# Altium PCB COMBINED.PcbDoc (part 2 of 3)
Units mil, origin at the board's own origin, x right, y up, seen from the top; angles counter-clockwise.
Board outline 6800 x 2100 mil, 4 copper layers (Top Layer, Mid-Layer 1, Mid-Layer 2, Bottom Layer); 221 components, 0 nets, 1007 pads, 208 vias.
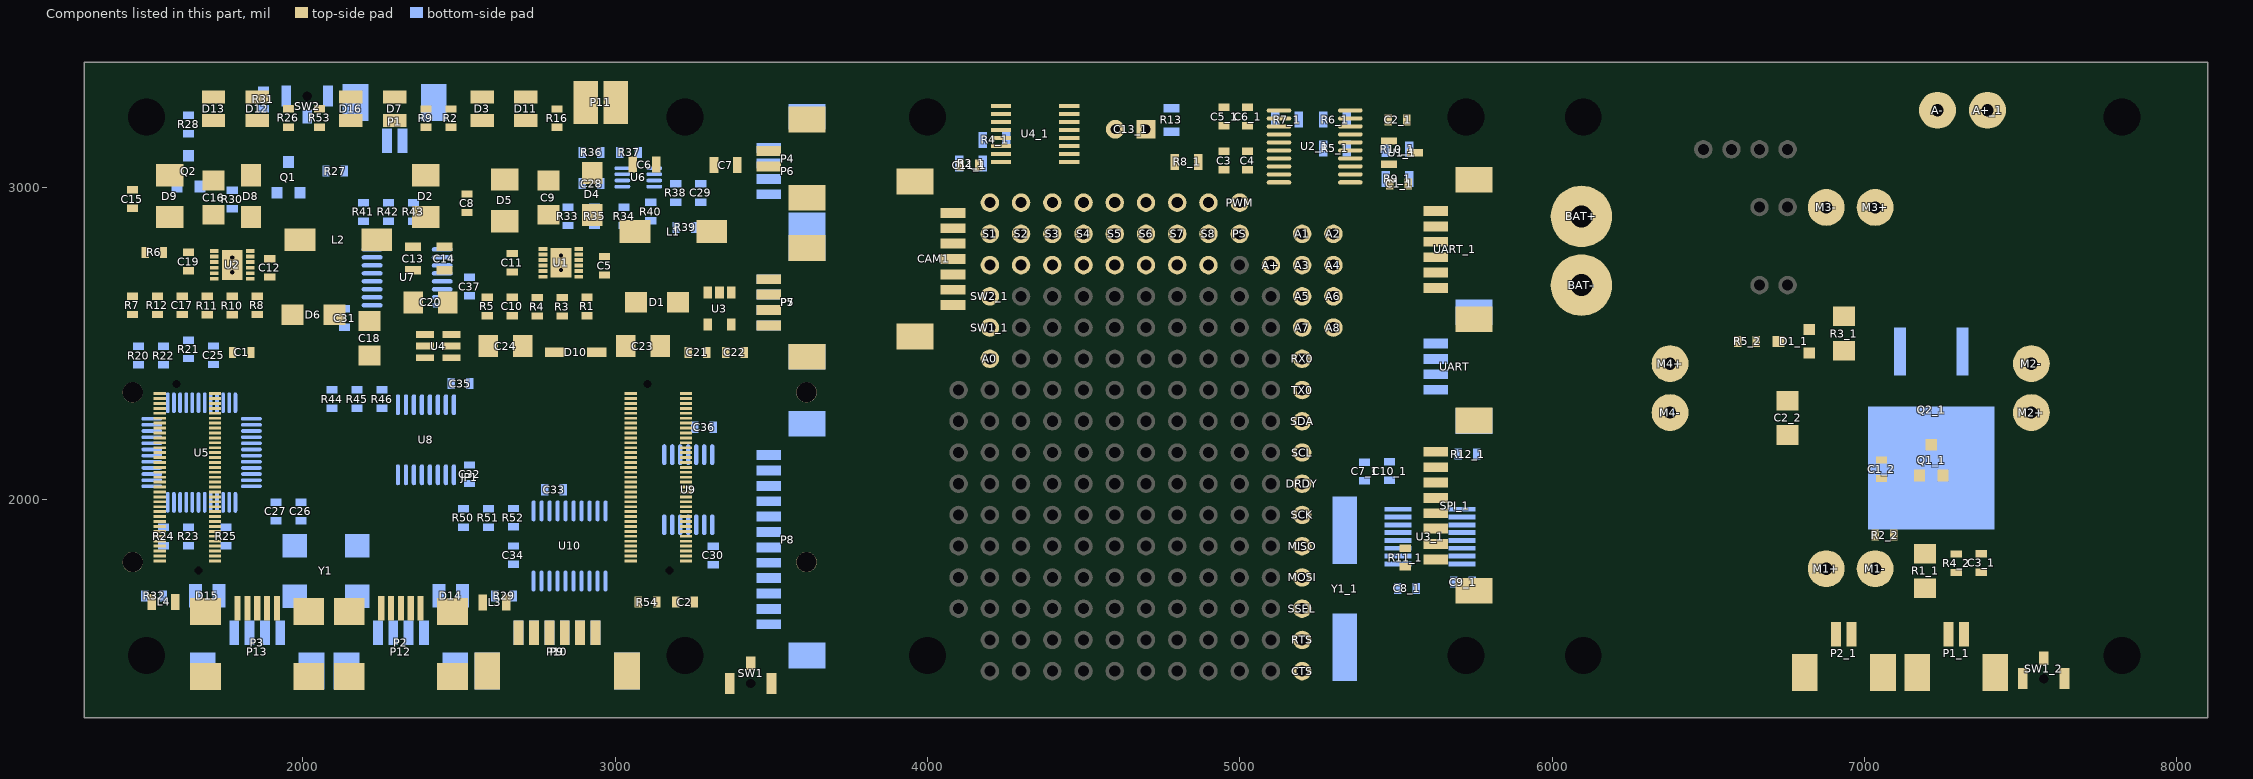
[diagram p4: the components of this part, seen from the top]

## Via types
v1: diameter 30, hole 15, Top Layer to Bottom Layer, 126 vias
v2: diameter 50, hole 28, Top Layer to Bottom Layer, 82 vias

## Nets (pads, with @x,y where several pads share a name; then routed paths per layer and width w, separated by ;. In a path a pad name is that pad's centre, name@x,y a point inside that pad or via, vN(x,y) a via of type N, cw(c..) or ccw(c..) an arc to the next point about the centre after c; other vN are vias at no path point) (continued)
copper on no net: | length 181000.9
  Top Layer w9: v1(1424.33,1845.83) 1474.33,1845.83 1484.74,1835.42 1541.39,1835.42 1542.2,1834.61 ; v1(1438.07,2035.28) 1428.93,2044.42 1428.93,2146.21 1448.03,2165.32 1542.2,2165.32 ; v1@1441.16,2202.66 1409.33,2170.83 1409.33,1925.83 1454.33,1880.83 1494.33,1880.83 1509.06,1866.1 1542.2,1866.1 ; v1@1441.16,2242.66 1389.33,2190.83 1389.33,1920.83 1449.33,1860.83 1484.33,1860.83 1494.8,1850.35 1542.2,1850.35 ; v1(1454.33,2070.83) 1454.33,2140.12 1463.78,2149.57 1542.2,2149.57 ; v1(1464.33,1955.83) 1474.33,1955.83 1499.02,1931.14 1511.03,1931.14 1513.07,1929.09 1542.2,1929.09 1541.39,1929.91 1534.07,1929.91 ; v1@1466.81,1913.35 1469.7,1916.23 1504.85,1916.23 1507.74,1913.35 1542.2,1913.35 1541.39,1914.16 ; v1(1489.33,1985.83) 1499.33,1975.83 1499.33,1955.83 1509.11,1946.04 1517.2,1946.04 1518.4,1944.84 1542.2,1944.84 ; 1542.2,1818.86 1571.3,1818.86 1579.33,1810.83 1579.33,1785.83 1569.33,1775.83 v1(1544.33,1775.83) ; 1542.2,1897.6 1565.39,1897.6 1577.16,1885.83 v1(1594.33,1885.83) ; 1542.2,2007.83 1651.77,2007.83 1669.37,2025.43 1669.37,2099.25 1626.09,2142.53 1626.09,2249.87 v1(1628.03,2251.81) ; 1542.2,2039.33 1582.64,2039.33 1597.52,2024.45 1640.83,2024.45 1649.69,2033.31 1649.69,2097.86 1583.74,2163.8 1583.74,2228.19 1586.69,2231.14 v1(1587.68,2231.14) ; 1542.2,2070.83 1578.7,2070.83 1595.55,2053.98 v1(1616.22,2053.98) ; 1542.2,2118.07 1597.4,2118.07 1613.27,2102.2 v1(1613.27,2096.3) ; v1(1667.4,2201.61) 1682.17,2201.61 1686.97,2196.81 1719.37,2196.81 1718.56,2197.63 ; v1(1669.37,2160.28) 1690.16,2181.06 1719.37,2181.06 ; 1719.37,1803.11 1787.12,1803.11 1822.84,1767.39 v1(1822.84,1720.83) 1822.84,1650.83 ; 1719.37,1818.86 1806.3,1818.86 1854.33,1770.83 1854.33,1650.83 ; 1719.37,1834.61 1835.55,1834.61 1904.06,1766.1 v2(1904.06,1721.1) ; 1719.37,1850.35 1693.11,1850.35 1684.25,1841.5 1684.25,1795.91 1724.33,1755.83 v2(1729.33,1755.83) v2@1734.33,1755.83 ; 1719.37,1929.09 1826.06,1929.09 v1(1864.33,1890.83) ; 1719.37,1960.59 1839.09,1960.59 v1(1839.33,1960.83) ; 1719.37,2023.58 1751.93,2023.58 1788.56,1986.95 1920.26,1986.95 1967.88,2034.58 1967.88,2327.32 1874.78,2420.42 1807.95,2420.42 1806.28,2422.09 1739.25,2422.09 1721.54,2404.37 1721.54,2373.86 1722.57,2372.83 v1(1723.33,2372.83) ; 1719.37,2055.08 1747.99,2055.08 1801.22,2001.85 1914.08,2001.85 1952.98,2040.75 1952.98,2312.69 1870.16,2395.51 v1(1756.97,2395.51) ; 1719.37,2086.57 1758.58,2086.57 1828.4,2016.76 1906.76,2016.76 1938.07,2048.07 1938.07,2298.07 1866.22,2369.92 v1(1790.43,2369.92) ; 1719.37,2118.07 1748.17,2118.07 1774.86,2091.38 1792.52,2091.38 1818.98,2117.83 v1@1818.98,2290.59 ; 1719.37,2228.31 1758.82,2228.31 1765.83,2221.3 v1(1765.83,2177.01) ; 1719.37,2259.8 1720.19,2258.99 1749.22,2258.99 1791.23,2216.97 1791.23,2136.47 v1(1778.62,2123.86) ; 1719.37,2275.55 1762.76,2275.55 1806.93,2319.72 1838.66,2319.72 1892.8,2265.59 v1(1892.8,2081.54) ; 1719.37,2291.3 1742.75,2291.3 1789.88,2338.43 1851.46,2338.43 1921.34,2268.54 1921.34,2069.72 v1(1893.78,2042.17) ; 1719.37,2307.05 1693.11,2307.05 1682.02,2318.14 1682.02,2413.52 1739.33,2470.83 1739.33,2490.78 v2(1775.09,2526.54) ; v1@1819.96,2288.23 1820.43,2288.7 v1(1820.43,2290.59) ; 2009.84,1650.83 2019.69,1640.98 ; 2282.84,1650.83 2284.74,1652.73 v1@2284.74,1765.83 ; v1(2289.33,1765.83) 2273.93,1781.23 2273.93,2040.42 2619.74,2386.23 2960.07,2386.23 2977.92,2368.38 3067.21,2368.38 3094.65,2395.83 3119.33,2395.83 3159.24,2355.92 3248.79,2355.92 3258.36,2346.36 3258.36,2330.73 3250.42,2322.8 3227.24,2322.8 ; 2314.33,1650.83 v1(2314.33,1717.87) 2314.74,1718.28 2314.74,1776.35 2314.33,1776.76 2314.33,1820.83 2339.33,1845.83 2479.33,1845.83 2554.33,1770.83 3094.33,1770.83 3167.34,1843.84 3167.34,2318.84 3186.52,2338.02 3226.72,2338.02 3227.24,2338.54 ; 2345.83,1650.83 2345.83,1739.33 2334.33,1750.83 2334.33,1805.83 2349.33,1820.83 2468.46,1820.83 2541.42,1747.87 3074.33,1747.87 ; 2374.33,1653.82 2377.32,1650.83 2379.33,1652.83 ; v2@2374.33,1755.83 v2(2374.33,1775.83) ; v2(2469.33,2965.83) 2481.02,2977.52 2526.54,2977.52 2577.64,2977.52 2584.33,2970.83 ; 2688.93,1575.25 2691.3,1572.87 ; 2688.93,1695.42 2691.3,1697.8 ; v1(2719.33,1650.83) 2729.33,1650.83 2740.51,1639.65 2740.51,1572.87 ; v1(2744.33,1895.83) 2744.33,1880.83 2790.55,1834.61 3050.08,1834.61 ; v1(2754.72,1676.22) 2754.33,1675.83 2754.33,1660.83 2789.72,1625.43 2789.72,1572.87 ; v1(2794.33,1675.83) 2794.33,1665.83 2838.94,1621.22 2838.94,1572.87 ; v1(2833.71,1675.83) 2834.33,1675.83 2888.15,1622.01 2888.15,1572.87 ; v1(2839.33,1900.83) 2839.33,1894.9 2883.87,1850.35 3050.08,1850.35 3049.26,1851.17 ; v1(2879.33,1890.83) 2969.33,1890.83 2979.96,1901.45 3013.71,1901.45 3017.56,1897.6 3050.08,1897.6 ; v1(2899.33,2360.83) 2899.33,2095.83 3003.07,1992.09 3050.08,1992.09 ; v1(2929.33,2290.83) 2929.33,2245.83 2978.35,2196.81 3050.08,2196.81 ; v1(2951.68,2353.48) 2957.18,2347.98 3020.58,2347.98 3026.08,2353.48 3076.68,2353.48 3152.44,2277.72 3152.44,1988.93 3108.35,1944.84 3050.08,1944.84 ; v1(2994.33,1875.83) 3000.35,1881.85 3050.08,1881.85 ; v1(2994.33,2290.83) 2999.33,2290.83 3013.79,2276.37 3049.26,2276.37 3050.08,2275.55 ; v1(2999.33,1805.83) 3012.36,1818.86 3050.08,1818.86 ; 3002.56,3237.6 3002.56,3270.83 3032.56,3300.83 ; 3050.08,1803.11 3086.61,1803.11 v1(3099.33,1815.83) ; 3050.08,1866.1 v1@3094.33,1866.1 ; 3050.08,2133.82 3087.32,2133.82 3094.33,2140.83 v1(3094.33,2210.83) ; 3050.08,2244.06 3101.1,2244.06 3122.63,2222.53 3122.63,2039.12 v1(3094.33,2010.83) ; 3050.08,2307.05 3088.11,2307.05 3137.53,2257.63 3137.53,2014.03 v1(3094.33,1970.83) ; 3074.33,1670.83 3074.33,1747.87 ; v1@3099.33,2005.83 v1@3104.33,2005.83 ; v2(3214.33,1730.83) 3224.33,1740.83 3224.33,1803.11 ; 3227.24,1850.35 3227.24,1866.1 ; 3227.24,1944.84 3283.35,1944.84 3305.24,1966.73 v1(3305.24,1972.99) ; 3227.24,1960.59 3228.06,1961.41 3259.91,1961.41 3269.33,1970.83 v1(3269.33,1980.83) ; 3227.24,2007.83 3291.34,2007.83 v1(3294.33,2010.83) ; 3227.24,2055.08 3258.58,2055.08 ; 3227.24,2118.07 3204.04,2118.07 3197.15,2111.18 3197.15,2030.49 3204.06,2023.58 3227.24,2023.58 3267.09,2023.58 3394.33,2150.83 3394.33,2200.83 ; 3227.24,2181.06 3204.06,2181.06 3182.25,2159.25 3182.25,1823.74 3106.38,1747.87 3074.33,1747.87 ; 3234.33,2470.83 3234.33,2440.83 3244.33,2430.83 3314.33,2430.83 3354.33,2470.83 ; v1(3424.33,2655.83) 3491.89,2655.83 3492.28,2655.43 ; 3439.33,2195.83 v2(3484.33,2195.83) ; 3492.28,2606.22 3608.94,2606.22 v1(3609.33,2605.83)
  Top Layer w10: 1454.33,2590.83 1425.24,2619.92 1425.24,2669.09 1545.24,2789.09 ; 1495.28,2790.83 1495.28,2774.57 1409.33,2688.62 1409.33,2416.38 1418.39,2407.32 1617.2,2407.32 1653.94,2370.59 1653.94,2241.08 ; 1554.33,2790.83 1589.13,2825.63 1667.4,2825.63 1673.31,2819.72 1673.31,2801.02 1696.93,2777.4 1717.24,2777.4 ; 1614.33,2650.83 1687.76,2724.25 1717.24,2724.25 ; 1634.33,2790.83 1665.47,2759.69 1717.24,2759.69 ; 1653.93,2241.07 1653.93,2231.69 1653.94,2226.54 1641.5,2214.09 1641.5,2149.76 1685.12,2106.14 1685.12,1923.71 1695.48,1913.35 1719.37,1913.35 ; 1694.33,2649.88 1695.95,2651.5 1695.95,2685.24 1717.24,2706.54 ; 1719.37,2322.8 1719.37,2338.54 1719.37,2340.15 1697.43,2362.1 1697.43,2402.05 1735.15,2439.77 1763.28,2439.77 1775.28,2451.77 1775.28,2470.83 1789.33,2470.83 1804.33,2455.83 1804.33,2445.83 1814.33,2435.83 1874.38,2435.83 1914.38,2475.83 v2@1979.87,2475.83 ; 1734.33,2590.83 1734.33,2677.01 1774.33,2717.01 1774.33,2727.2 1774.33,2750.83 ; 1831.42,2724.25 1848.81,2724.25 1856.1,2716.96 1856.1,2652.6 1854.33,2650.83 ; 1831.42,2741.97 1831.42,2759.69 ; 1831.42,2777.4 1849.49,2777.4 1865.24,2761.65 1865.24,2740.87 1894.33,2711.77 1967.4,2638.7 1967.4,2590.83 ; 1834.33,2903.9 1831.42,2900.98 1831.42,2795.12 1870.04,2795.12 1894.33,2770.83 ; 2391.85,2528.39 2392.01,2528.23 ; 2414.33,2490.83 2451.73,2453.43 ; 2590.87,2588.11 2670.87,2588.11 ; 2666.54,2637.52 2666.54,2652.52 2744.96,2730.95 2769.45,2730.95 ; 2670.87,2787.17 2707.83,2787.17 2728.62,2766.38 2769.45,2766.38 ; 2746.54,2636.57 2749.88,2639.92 2749.88,2693.66 2769.45,2713.23 ; 2790.43,2587.17 2790.43,2677.01 2826.54,2713.11 2826.54,2733.9 2826.54,2757.52 ; 2826.54,2642.24 2831.46,2647.17 ; 2883.62,2730.95 2901.01,2730.95 2908.31,2723.65 2908.31,2647.17 2910.87,2647.17 ; 2883.62,2748.66 2883.62,2766.38 ; 2883.62,2784.09 2907.76,2784.09 2926.26,2765.59 2926.26,2724.25 2932.05,2718.46 2966.54,2718.46 ; 2883.62,2801.81 2915.53,2801.81 2939.82,2777.52 2966.54,2777.52 ; 3063.5,2833.94 3063.5,2857.52 ; 3293.39,2470.83 3296.93,2474.37 ; 3296.93,2662.01 3296.93,2638.23 3304.33,2630.83 3359.33,2630.83 3371.73,2643.23 3371.73,2662.01 ; v1(4005,2635) 4000.59,2630.59 4000.59,2629.17 4007.8,2621.97 4082.05,2621.97 ; v1(4010,2870) 4011.97,2868.03 4082.05,2868.03 ; v1(4014.83,2765.17) 4019.26,2769.61 4082.05,2769.61 ; v1(4015,2815) 4018.82,2818.82 4082.05,2818.82 ; v1(4055,3045) 4080,3070 4105,3070 ; 4082.05,2671.18 4033.36,2671.18 3962,2742.54 3962,2896.16 4095.84,3030 4274.6,3030 4330,3085.4 4330,3105 4303.39,3131.61 4235.75,3131.61 ; 4082.05,2917.24 4120,2955.2 v1(4120,2965) ; v1(4140,3200) 4140,3145.59 4179.57,3106.02 4235.75,3106.02 ; v1(4150,3000) 4091.3,3000 3980,2888.7 3980,2750 4009.61,2720.39 4082.05,2720.39 4130.39,2720.39 4148,2738 4148,2873 4175,2900 4950,2900 5000,2950 ; 4174.49,3080.43 4164.06,3070 4180,3070 4190.43,3080.43 4235.75,3080.43 4285.43,3080.43 v1(4295,3090) ; v1(4175,3230) 4175,3170 4187.8,3157.2 4235.75,3157.2 ; 4200,2950 4230,2950 4411.61,3131.61 4454.25,3131.61 ; 4235.75,3233.98 4296.02,3233.98 v1(4310,3220) ; 4300,2950 4300,2990 4416.02,3106.02 4454.25,3106.02 ; v1(4342.8,3157.2) 4454.25,3157.2 ; v1(4363.98,3233.98) 4454.25,3233.98 ; 4454.25,3080.43 4569.57,3080.43 4700,2950 ; 4454.25,3182.8 4507.2,3182.8 4690,3000 4750,3000 4800,2950 ; 4454.25,3208.39 4511.61,3208.39 4700,3020 4830,3020 4900,2950 ; 4454.25,3259.57 4509.57,3259.57 v1(4525,3275) ; v1(4740,3090) 4749.25,3080.75 4792.6,3080.75 ; 5125.83,3014.84 5050,2939.02 5050,2625 5075,2600 5150,2600 5200,2550 ; 5125.83,3040.43 5167.76,3040.43 5178.2,3030 5178.2,3006.6 5139.47,2967.88 5139.47,2785.07 5157.47,2767.07 5157.47,2692.53 5200,2650 ; 5125.83,3066.02 5178.98,3066.02 5196.2,3048.8 5196.2,2999.15 5157.47,2960.42 5157.47,2792.53 5200,2750 ; 5125.83,3091.61 5183.39,3091.61 5214.2,3060.8 5214.2,2991.69 5175.47,2952.97 5175.47,2874.53 5200,2850 ; 5125.83,3117.2 5028.15,3117.2 5025,3114.06 4950,3114.06 4950,3195.94 5025,3195.94 ; 5125.83,3142.8 5042.2,3142.8 5025,3160 5025,3195.94 ; 5200,1450 5520,1450 v1(5575,1505) ; 5200,1550 5550,1550 v1(5610,1610) ; 5200,1650 5273.94,1650 5482.8,1858.86 ; 5200,1750 5324.72,1750 5579.33,2004.61 5627.95,2004.61 ; 5200,1850 5375.51,1850 5579.33,2053.82 5627.95,2053.82 ; 5200,1950 5426.3,1950 5579.33,2103.03 5627.95,2103.03 ; 5200,2050 5455,2050 5558.07,2153.07 5647.28,2153.07 ; 5200,2150 5200,2189.86 5260.53,2250.38 5260.53,2374.02 5450.53,2564.02 5450.53,2725.53 5500.39,2775.39 5627.95,2775.39 5628.35,2775 v1(5725,2775) ; 5200,2250 5242.53,2292.53 5242.53,2381.47 5332.53,2471.47 5432.53,2571.47 5432.53,2732.98 5524.15,2824.61 5627.95,2824.61 5694.61,2824.61 v1(5695,2825) ; 5200,2350 5224.53,2374.53 5224.53,2388.93 5325.07,2489.47 5414.53,2578.93 5414.53,2740.44 5547.91,2873.82 5627.95,2873.82 ; 5200,2450 5260.14,2450 5317.62,2507.47 5396.53,2586.38 5396.53,2747.89 5571.66,2923.03 5627.95,2923.03 ; v1(5230,3215) 5225.43,3219.57 5125.83,3219.57 5079.57,3219.57 5055,3195 5025.94,3195 5025,3195.94 ; 5300,2550 5378.53,2628.53 5378.53,2955.34 5354.17,2979.69 5354.17,3014.84 ; 5300,2650 5300,2689.86 5360.53,2750.38 5360.53,2947.88 5301.8,3006.6 5301.8,3035 5307.24,3040.43 5354.17,3040.43 ; 5300,2750 5300,2789.86 5342.53,2832.38 5342.53,2940.42 5321.48,2961.48 5283.8,2999.15 5283.8,3053.8 5296.02,3066.02 5354.17,3066.02 ; 5300,2850 5324.53,2874.53 5324.53,2932.97 5265.8,2991.69 5265.8,3067.78 5289.64,3091.61 5354.17,3091.61 ; 5354.17,3117.2 5417.2,3117.2 v1(5420,3120) ; 5354.17,3193.98 5401.02,3193.98 v1(5425,3170) ; 5354.17,3219.57 5424.57,3219.57 v1(5425,3220) ; v1(5420,3075) 5422.4,3072.6 5478.66,3072.6 5478.66,3012.28 5480.94,3010 ; v1(5440,1735) 5515,1735 5530,1750 5530,1784.27 5570,1824.27 5570,1875 5601.18,1906.18 5627.95,1906.18 ; v1(5475,3260) 5475.94,3259.06 5475.94,3215 5478.66,3212.28 5478.66,3147.4 ; 5530,1843.33 5498.33,1843.33 5482.8,1858.86 ; v1(5550,2735) 5558.82,2726.18 5627.95,2726.18 ; v1(5560,2675) 5561.97,2676.97 5627.95,2676.97 ; 5627.95,1807.76 5627.95,1712.05 v1(5655,1685) ; 5627.95,1856.97 5768.03,1856.97 v1(5790,1835) ; 5627.95,1955.39 5579.33,1955.39 5482.8,1858.86 ; 5647.28,1956.22 5708.94,1956.22 v1(5789.33,1875.83) ; 5647.28,2005.43 5728.94,2005.43 v1(5734.33,2010.83) ; 5647.28,2054.65 5705.51,2054.65 v1(5714.33,2045.83) ; 5647.28,2103.86 5741.3,2103.86 5789.33,2055.83 v1(5789.33,1920.83)
  Top Layer w15: 1711.73,3290.83 1714.33,3288.23 ; v2(1775.09,2526.54) 1813.62,2526.54 1834.33,2505.83 1834.33,2470.83 ; 1885.83,1650.83 1885.83,1702.87 v2(1904.06,1721.1) v2@1904.33,1721.38 ; 2214.33,2550.83 2214.33,2639.29 2273.7,2698.66 2384.92,2698.66 2412.48,2671.1 2412.48,2592.4 2476.65,2528.23 ; 2251.34,1650.83 2251.34,2052.83 2605.93,2407.42 2743.68,2407.42 2743.75,2407.49 2967.67,2407.49 2988.87,2386.29 3059.79,2386.29 3094.33,2420.83 3124.33,2420.83 3164.33,2380.83 3254.33,2380.83 3284.33,2350.83 3284.33,2080.83 3258.58,2055.08 ; 2392.01,2490.83 2414.33,2490.83 ; 2451.73,2453.43 2476.65,2453.43 2508.54,2421.54 v2(2540.09,2421.54) ; 2464.57,2630.83 2464.57,2661.06 ; 2590.87,2647.17 2590.87,2697.32 v2(2605.09,2711.54) ; v2@2621.66,2728.11 2670.87,2728.11 ; 2688.93,1575.25 2688.93,1695.42 ; 2691.3,1697.8 v1@2711.83,1718.33 ; 2704.57,2490.83 2744.38,2490.83 v2(2785.09,2531.54) 2785.09,2581.82 2790.43,2587.17 ; 2714.33,3288.23 2775.98,3288.23 2814.33,3249.88 ; 2937.36,1572.87 2937.36,1623.86 v2(2964.33,1650.83) 2999.33,1615.83 3124.33,1615.83 3133.39,1624.88 3133.39,1670.83 3194.33,1670.83 3194.33,1700.83 3214.33,1720.83 v2(3214.33,1730.83) ; 3029.33,2485.83 3034.33,2490.83 ; 3144.57,2490.83 3164.33,2490.83 ; 3201.26,2630.83 3249.33,2630.83 3280.51,2662.01 3296.93,2662.01 ; 3214.33,1860.83 3244.33,1860.83 3260.34,1844.82 3260.34,1799.82 3279.33,1780.83 3279.33,1696.77 3253.39,1670.83 ; 3296.93,2474.37 3296.93,2559.65 ; v1(3334.33,2524.83) 3354.33,2504.83 3354.33,2470.83 ; 3334.33,2662.01 3334.33,2695.83 3374.33,2735.83 v2(3404.33,2735.83) 3461.1,2735.83 3492.28,2704.65 ; 3367.4,1410.83 v1@3367.4,1513.9 ; 3371.73,2559.65 3371.73,2533.43 3414.33,2490.83 3414.33,2471.77 ; 3371.73,2605.83 v2(3404.33,2605.83) ; v1(3424.33,3135.83) 3424.33,3060.1 3541.87,2942.56 3541.87,2758.15 3569.33,2730.69 v1(3569.33,2705.83) 3644.33,2630.83 3644.33,2585.83 3615.51,2557.01 3492.28,2557.01 ; 3492.28,3066.22 3492.68,3065.83 v1(3569.33,3065.83) ; 3492.28,3115.43 3492.68,3115.83 v1(3599.33,3115.83) ; 6909.72,1567.87 6909.72,1621.22 6924.33,1635.83 7159.33,1635.83 7227.28,1567.87 7269.72,1567.87 v1(7269.72,1491.22) ; 6958.94,1567.87 7182.28,1567.87 7234.33,1515.83 7234.33,1470.83 7254.33,1450.83 7299.33,1450.83 7318.94,1470.43 7318.94,1567.87 7452.28,1567.87 7507.4,1512.76 7507.4,1425.83 ; v1(7639.33,1490.83) 7641.26,1488.9 7641.26,1425.83
  Top Layer w20: v2(1444.33,1650.83) 1465.32,1671.81 1516.93,1671.81 ; 1534.33,2591.77 1614.33,2591.77 ; 1546.46,2931.77 1574.33,2903.9 ; 1591.73,1671.81 1658.15,1671.81 1688.98,1640.98 1688.98,1432.32 2019.69,1432.32 2019.69,1640.98 ; v2(1629.33,3290.83) 1711.73,3290.83 ; 1694.33,2590.83 1734.33,2590.83 1774.33,2590.83 ; 1707.4,2903.9 1714.33,2910.83 1717.24,2907.91 1717.24,2802.99 ; v2(1714.33,3155.83) 1714.33,3213.43 ; 1775.28,2650.83 1854.33,2650.83 ; v2(1784.33,1755.83) 1784.33,1657.83 1791.34,1650.83 ; v2(1854.33,3155.83) 1854.33,3213.43 ; 1854.33,3288.23 1915.98,3288.23 1954.33,3249.88 ; 1894.33,2770.83 1931.3,2770.83 1991.3,2830.83 ; 1917.32,1650.83 2009.84,1650.83 ; v2(1954.33,3145.83) 1954.33,3190.83 ; v2(2054.33,3150.83) 2054.33,3145.83 2054.33,3190.83 ; 2054.33,3249.88 2092.68,3288.23 2154.33,3288.23 ; 2148.98,1640.98 2148.98,1432.32 2479.69,1432.32 2479.69,1640.98 2508.54,1669.84 2576.93,1669.84 ; v2(2149.33,3120.83) 2154.33,3125.83 2154.33,3213.43 ; 2214.33,2440.59 2257.44,2397.48 2360.32,2397.48 2392.01,2429.17 2392.01,2453.43 ; v2(2219.33,3140.83) 2272.43,3140.83 2294.33,3162.73 2294.33,3213.43 ; 2237.36,2830.83 2259.96,2808.23 2353.35,2808.23 2453.35,2808.23 ; 2294.33,3288.23 2355.98,3288.23 2394.33,3249.88 ; v2(2312.09,2456.54) 2346.38,2490.83 2392.01,2490.83 ; v2(2312.09,2528.39) 2391.85,2528.39 ; 2353.35,2733.43 2453.35,2733.43 ; 2374.33,1653.82 v2(2374.33,1775.83) ; 2394.33,3190.83 v2(2394.33,3145.83) v2(2474.33,3145.83) 2474.33,3190.83 ; 2474.33,3249.88 2512.68,3288.23 2574.33,3288.23 ; 2476.65,2490.83 2594.33,2490.83 2594.33,2446.93 2610.43,2430.83 2733.99,2430.83 2773.99,2470.83 v2@2807.4,2470.83 ; v2(2539.33,3155.83) 2574.33,3190.83 2574.33,3213.43 ; v2(2574.33,1605.83) 2624.33,1605.83 2651.73,1633.23 2651.73,1669.84 ; 2618.66,2918.46 2646.54,2890.59 2717.6,2890.59 2744.53,2917.52 2786.54,2917.52 2786.54,2858.15 2769.76,2841.38 2769.76,2805.95 ; v2(2644.33,3175.83) 2681.93,3213.43 2714.33,3213.43 ; 2750.87,2587.17 2790.43,2587.17 2830.87,2587.17 ; v2(2779.33,3170.83) v2@2794.33,3170.83 ; 2814.33,3190.83 v2@2794.33,3170.83 ; 2831.46,2647.17 2908.31,2647.17 ; 2906.1,3270.83 2906.1,3182.6 2894.33,3170.83 v2@2794.33,3170.83 ; 2910.87,2588.11 2944.29,2588.11 2982.36,2550.04 ; 2941.26,2470.83 2941.26,2508.94 2982.36,2550.04 ; 2966.54,2718.46 2966.54,2684.96 3024.33,2627.17 3063.94,2627.17 ; 2966.54,2777.52 3007.09,2777.52 3063.5,2833.94 ; 3144.57,2490.83 3144.57,2455.59 v2(3179.33,2420.83) ; 3164.33,2490.83 3279.33,2605.83 3371.73,2605.83 3371.73,2559.65 ; v2(3254.33,2780.83) 3234.33,2800.83 v2@3197.8,2800.83 ; 3309.57,2857.52 3239.65,2857.52 3197.8,2815.67 v2(3197.8,2805.83) v2@3197.8,2800.83 ; 3434.33,1475.79 3479.29,1475.79 v2(3504.33,1500.83) 3504.33,1413.9 3501.26,1410.83 ; 7167.09,2066.77 7176.93,2076.61 ; 2982.36,2550.04 2992.15,2559.83 3186.05,2559.83 3197.8,2571.57 v2@3197.8,2800.83
  Top Layer w25: 1454.33,2931.77 1546.46,2931.77 ; 4200,2850 4300,2850 4400,2850 4500,2850 4600,2850 4700,2850 4800,2850 4900,2850 5000,2850 ; 6754.33,2205.83 6764.33,2195.83 ; v2@6904.33,2135.83 v2@6914.33,2125.83 ; 6924.33,2475.83 6934.33,2475.83 ; 7035.28,1778.58 7035.28,1885.83 ; 7054.33,2066.77 7167.09,2066.77 ; 7094.33,1866.77 7094.33,1885.83 7094.33,1845.83 7129.33,1810.83 7129.33,1730.83 7144.57,1715.59 7194.33,1715.59 7244.57,1715.59 7269.72,1690.43 7269.72,1567.87 ; 7295.28,1766.77 7374.33,1766.77 7374.33,1700.83 7318.94,1645.43 7318.94,1567.87
  Top Layer w30: 1574.33,2903.9 1707.4,2903.9 ; 1714.33,2910.83 1789.06,2985.55 1793.19,2981.42 1875.47,2981.42 1960.79,3066.73 2303.43,3066.73 2319.33,3050.83 2319.33,2978.9 2394.33,2903.9 2511.97,2903.9 2526.54,2918.46 2618.66,2918.46 ; v2@1734.33,1755.83 v2(1784.33,1755.83) ; 1854.33,2591.77 1913.78,2532.32 2042.76,2532.32 2097.52,2587.09 ; 2101.26,2590.83 2097.52,2587.09 ; 2217.36,2830.83 2154.88,2830.83 2097.52,2773.46 2097.52,2587.09 ; v2(2312.09,2528.39) 2312.09,2588.58 2354.33,2630.83 ; 2464.57,2630.83 2464.57,2661.06 2515.04,2711.54 v2(2605.09,2711.54) ; 3139.33,3071.81 3139.96,3072.44 3314.33,3072.44 3314.33,3107.04 3354.28,3146.99 v2(3354.28,3250.78) ; v2(3354.33,2200.83) 3394.33,2200.83 3479.33,2200.83 v2(3484.33,2195.83) ; 6340.17,2616.67 6451.02,2505.83 6595.28,2505.83 ; 6654.33,2505.83 6725.12,2505.83 6725.12,2430.04 6754.33,2400.83 6754.33,2316.06 ; 6823.54,2468.43 6896.93,2468.43 6904.33,2475.83 6934.33,2475.83 ; v2@6914.33,2125.83 7054.33,2125.83 7202.52,2125.83 7251.73,2076.61 ; v2(7059.33,2475.83) 7059.33,2375.83 7214.33,2220.83 7214.33,2175.04 7260.12,2175.04 7314.33,2120.83 7314.33,1910.83 7294.33,1890.83 7294.33,1824.88 ; 7176.93,2076.61 7176.93,1953.23 7194.33,1935.83 7194.33,1825.83 ; v2(7224.33,2655.83) 7224.33,2360.83 7374.33,2210.83 7374.33,1825.83
  Top Layer w40: v2(2824.33,3305.83) 2871.1,3305.83 2906.1,3270.83 ; v2(3029.33,2425.83) 3029.33,2420.83 3029.33,2485.83 ; 6764.33,2195.83 v2(6904.33,2195.83) ; 6934.33,2475.83 v2(7059.33,2475.83) ; 6934.33,2586.06 6934.33,2747.1 7216.2,3028.96
  Top Layer w50: v2@6904.33,2135.83 v2(6904.33,2195.83) ; 7034.65,1777.95 7035.28,1778.58
  Top Layer w60: 2401.26,3037.76 2507.39,3037.76 2575.46,3105.83 2819.33,3105.83 2838.43,3124.92 2953.43,3124.92 3002.56,3174.06 3002.56,3270.83
  Top Layer w100: 6268.65,2543.95 6377.95,2434.65 ; 6744.33,1625.83 6877.95,1759.45 6877.95,1777.95 ; 7034.65,2934.65 7124.33,3024.33 ; 7257.13,2988.03 7394.33,3125.23 7394.33,3245.83 ; 7534.65,2277.95 7706.46,2277.95 7754.33,2325.83
  Top Layer w200: 6744.33,1625.83 6409.33,1625.83 6134.33,1900.83 6134.33,2410.83 6374.33,2650.83 6374.33,2790.83 6259.33,2905.83 6094.33,2905.83 6309.33,3120.83 7124.33,3120.83 7257.13,2988.03 7754.33,2490.83 7754.33,2325.83
  Mid-Layer 1 w9: 1859.3,2400.79 2294.26,1965.83 2364.33,1965.83 2399.74,1930.42 2873.93,1930.42 3094.33,2150.83 v1(3094.33,2210.83) ; 1859.33,2400.79 1859.33,2460.83 2014.33,2615.83 v1(2014.33,2910.83)
  Mid-Layer 1 w20: v2(2149.33,3120.83) 2089.33,3120.83 1994.33,3025.83 1569.33,3025.83 1454.33,2910.83 1454.33,2755.83 2324.33,1885.83 2569.33,1885.83 2584.33,1900.83 2664.33,1900.83 2779.33,1785.83 2959.33,1785.83 3079.33,1665.83 3134.33,1665.83 ; v2(2699.33,2035.83) 2639.33,1975.83 2503.04,1975.83 2258.04,2220.83 v2(2254.33,2220.83) 2254.33,2250.83 2229.33,2275.83 2017.95,2275.83 1884.18,2409.59 1884.18,2450.68 2049.33,2615.83 3104.33,2615.83 3134.33,2645.83 v2(3134.33,2760.83) ; v2(2789.33,2465.83) 2904.33,2465.83 3134.33,2235.83 3134.33,1665.83 ; v2(3569.33,2040.83) 3569.33,1850.83 3319.33,1600.83 3199.33,1600.83 3134.33,1665.83 ; v1(4010,2870) 3962,2870 ; 4065,2465 4064.53,2465.47 ; 4100,2050 3962,2188 3962,2870 ; 4100,2350 4064.53,2385.47 4064.53,2465.47 ; v1(5560,2225) 5415,2225 ; v1(5730,1635) 5645,1635 5545,1735 v1(5440,1735) 5415,1760 v1(5415,2000) 5415,2225 ; v1(5790,1835) 5686.18,1835 5615,1906.18 5615,2552.1 5460,2707.1 5460,2880 v1(5221.21,3118.79) 5145,3195 4845,3195 4765,3275 v1(4595,3275) 4545,3225 4450,3225 4405,3270 4300,3270 4130,3100 4045,3100 3962,3017 3962,2870 ; 4064.53,2465.47 4064.53,2973.23 4181.3,3090 v1(4295,3090) 4630,3090 4680,3040 4870,3040 v1(4985,3155) 5115,3155 5420,2850 5420,2690.53 5560,2550.53 v1(5560,2500) 5415,2355 5415,2225
  Mid-Layer 1 w30: v2(1979.87,2473.39) 2057.31,2550.83 2134.33,2550.83 2156.77,2528.39 v2(2312.09,2528.39) 2641.89,2528.39 2694.33,2580.83 3114.33,2580.83 3197.8,2664.29 v2(3197.8,2805.83) ; v2(3254.33,2780.83) 3264.33,2770.83 3264.33,2115.83 3394.33,1985.83 3394.33,1845.83 v2(3279.33,1730.83)
  Mid-Layer 2 w9: v1(1464.33,1915.83) 1468.93,1911.23 1478.81,1911.23 1483.81,1916.23 1660.01,1916.23 1760.41,1815.83 2269.33,1815.83 v1(2309.33,1855.83) ; v1(1464.33,1955.83) 1641.49,1955.83 1766.3,1831.02 2219.52,1831.02 2344.33,1955.83 v1(2450.95,1955.83) ; v1(1489.33,1985.83) 1504.43,1970.73 1647.66,1970.73 1772.47,1845.92 2210.51,1845.92 2335.41,1970.83 2414.33,1970.83 v1(2439.33,1995.83) ; v1(1594.33,1885.83) 1669.33,1885.83 1754.33,1800.83 2319.33,1800.83 2355.95,1837.44 v1(2355.95,1920.83) ; v1(1839.33,1960.83) 1924.33,1875.83 2194.33,1875.83 2299.33,1980.83 v1(2299.33,2020.83) ; v1(1864.33,1890.83) 1894.33,1860.83 2204.33,1860.83 2344.33,2000.83 v1(2379.33,2000.83) ; v1(2951.68,2353.48) 3066.68,2353.48 3074.33,2345.83 3444.33,2345.83 3669.33,2570.83 3669.33,3100.83 3599.33,3170.83 3269.06,3170.83 3241.37,3143.14 3152.02,3143.14 v1(3124.33,3170.83) v1@3124.33,3165.83
  Mid-Layer 2 w10: v1(2899.33,2360.83) 2919.74,2381.23 3044.74,2381.23 3057.24,2393.74 3115.15,2393.74 3123.96,2384.92 3438.43,2384.92 3649.33,2595.83 3649.33,3030.83 3590.24,3089.92 3588.6,3089.92 3572.7,3105.83 3149.33,3105.83 v1(3124.33,3130.83)
  Mid-Layer 2 w20: v2(2094.33,2215.83) 2094.33,2160.83 2114.33,2140.83 2504.33,2140.83 2594.33,2050.83 v2(2594.33,2030.83) ; v2(2174.33,2185.83) 2174.33,2390.63 v2(2312.09,2528.39) ; v2@2180.24,2179.92 2680.24,2179.92 v2(2729.33,2130.83) ; v2(2405.09,2376.54) 2548.62,2376.54 2749.33,2175.83 3313.74,2175.83 v1(3346.54,2143.03) ; v2(2599.33,2115.83) 2634.33,2080.83 2769.33,2080.83 v2(2779.33,2090.83) ; v2(2644.33,3175.83) 2759.33,3060.83 3349.33,3060.83 3409.33,3000.83 3409.33,2940.83 3484.33,2865.83 3484.33,2625.83 3464.33,2605.83 v2(3404.33,2605.83)
  Bottom Layer w9: v1(1424.33,1845.83) 1424.33,1891.08 1389.84,1925.57 1389.84,2113.03 1416.85,2140.04 1516.73,2140.04 ; v1(1438.07,2035.28) 1454.71,2035.28 1479.74,2060.3 1479.74,2061.23 1479.8,2061.3 1516.73,2061.3 ; v1(1442.68,2201.14) 1469.33,2227.8 1469.33,2280.83 1504.33,2315.83 1504.33,2354.39 1429.33,2429.39 1429.33,2580.83 1499.33,2650.83 1809.33,2650.83 2134.33,2975.83 2134.33,3050.83 ; v1(1442.68,2241.14) 1412.7,2271.11 1412.7,2772.45 1470.98,2830.73 1729.24,2830.73 1774.33,2875.83 1774.33,2930.83 ; 1516.73,2080.98 1557.6,2080.98 1566.02,2089.41 1566.02,2134.69 1591.61,2160.28 v1(1669.37,2160.28) ; 1516.73,2258.15 1547.67,2258.15 1560.6,2245.22 1560.6,2218.85 1581.2,2198.25 1664.04,2198.25 v1(1667.4,2201.61) ; v1(1544.33,1775.83) 1544.33,1792.16 1408.54,1927.95 1408.54,2101.22 1427.68,2120.35 1516.73,2120.35 1547.94,2120.35 ; v1(1587.68,2231.14) 1603.43,2215.39 1639.84,2215.39 1646.73,2222.28 1646.73,2233.11 1663.46,2249.84 1711.69,2249.84 1725.39,2263.54 1725.39,2309.33 ; v1(1613.27,2096.3) 1621.14,2104.17 1680.2,2104.17 1740.42,2164.4 1740.42,2187.53 1771.67,2218.78 1835.63,2218.78 ; v1(1628.03,2251.81) 1641.68,2265.46 1698.77,2265.46 1705.71,2272.4 1705.71,2309.33 ; 1666.34,1990.43 1666.34,2049.96 1765.83,2149.45 v1(1765.83,2177.01) ; v1(1723.33,2372.83) 1723.33,2372.06 1745.08,2350.32 1745.08,2309.33 ; 1725.39,1990.43 1725.39,1939.76 1754.33,1910.83 ; 1731.73,1690.83 1750.01,1690.83 ; 1745.08,1990.43 1745.08,2092.28 1776.65,2123.86 v1(1778.62,2123.86) ; v1(1756.97,2395.51) 1756.97,2366.97 1764.76,2359.17 1764.76,2309.33 ; 1764.76,1990.43 1764.76,1944.64 1792.46,1916.94 1895.45,1916.94 1909.33,1930.83 ; 1784.45,1990.43 1784.45,1946.03 1795.06,1935.42 1873.74,1935.42 1899.14,1960.83 1965.28,1960.83 1994.33,1931.77 2148.39,1931.77 2174.33,1905.83 2174.33,1851.54 ; 1784.45,2309.33 1784.45,2342.28 1790.43,2348.27 v1(1790.43,2369.92) ; v1@1819.96,2288.23 1820.43,2288.7 v1(1820.43,2290.59) 1835.63,2275.39 1835.63,2258.15 ; v1(1822.84,1720.83) 1822.84,1579.76 1829.72,1572.87 ; 1835.63,2080.98 1892.24,2080.98 v1(1892.8,2081.54) ; 1835.63,2120.35 1898.86,2120.35 2059.24,2280.73 2059.24,2385.73 2059.24,2400.73 2279.33,2620.83 2279.33,2680.83 2262.13,2698.03 2222.13,2698.03 ; 1835.63,2140.04 1888.54,2140.04 2034.33,2285.83 2034.33,2400.83 2054.33,2420.83 2054.33,2560.83 2081.17,2587.67 2161.17,2587.67 2194.76,2621.26 2222.13,2621.26 ; 1835.63,2179.41 1837.05,2180.83 1899.33,2180.83 2009.33,2290.83 2009.33,2431.7 2030.18,2452.55 2030.18,2666.68 2057.24,2693.73 2151.43,2693.73 2172.72,2672.44 2222.13,2672.44 ; 1835.63,2199.09 1887.6,2199.09 1984.33,2295.83 1984.33,2427.78 2015.28,2458.72 2015.28,2672.85 2052.84,2710.41 2133.92,2710.41 2147.13,2723.62 2222.13,2723.62 ; 1839,2057.93 1835.63,2061.3 1874.65,2061.3 v1(1893.78,2042.17) ; v1(1854.33,1760.83) 1854.33,1660.83 1878.94,1636.22 1878.94,1572.87 ; v2@1894.33,1716.38 1899.06,1721.1 v2(1904.06,1721.1) ; 1914.33,1931.77 1974.33,1871.77 1974.33,1851.54 1975.04,1850.83 2069.33,1850.83 2139.33,1780.83 2139.33,1749.41 2080.04,1690.12 1974.33,1690.12 ; v1(2164.33,2760.83) 2164.33,2785.83 2178.9,2800.39 2222.13,2800.39 ; 2194.33,2949.88 2199.33,2954.88 ; 2222.13,2749.21 2290.95,2749.21 2304.43,2735.73 2304.43,2635.73 2379.33,2560.83 2464.33,2560.83 2734.33,2290.83 v1(2929.33,2290.83) ; 2222.13,2774.8 2223.15,2775.83 2285.41,2775.83 2319.33,2741.91 2319.33,2660.83 2389.33,2590.83 2455.89,2590.83 2720.89,2325.83 2930.26,2325.83 2965.26,2290.83 v1(2994.33,2290.83) ; v1@2284.74,1761.23 2284.74,1577.86 2289.72,1572.87 ; v1(2299.33,2020.83) 2330.35,2051.85 2330.35,2078.62 ; 2304.76,2303.03 2304.76,2220.39 2359.33,2165.83 2624.33,2165.83 v2(2659.33,2130.83) ; v1(2309.33,1855.83) 2339.33,1855.83 2407.13,1923.62 2407.13,2078.62 ; v1(2314.33,1717.87) 2314.33,1665.83 2338.94,1641.22 2338.94,1572.87 ; 2330.35,2303.03 2330.35,2224.8 2364.33,2190.83 2999.33,2190.83 3129.33,2060.83 3129.33,1765.76 3209.26,1685.83 3319.33,1685.83 3404.33,1600.83 3492.28,1600.83 ; v1@2354.33,1920.83 2344.33,1930.83 2344.33,2015.83 2355.95,2027.44 2355.95,2078.62 ; 2355.95,2303.03 2355.95,2277.59 2427.73,2205.8 3029.55,2205.8 3084.58,2260.83 3354.33,2260.83 3394.14,2221.02 3394.14,1833.38 3430.51,1797.01 3492.28,1797.01 ; v2(2374.33,1775.83) 2374.33,1755.83 2354.33,1735.83 2354.33,1650.83 2384.33,1620.83 2384.33,1576.69 2388.15,1572.87 ; v1@2381.54,2000.83 2381.54,2078.62 ; 2381.54,2303.03 2381.54,2277.59 2438.42,2220.7 3023.38,2220.7 3078.4,2275.73 3364.43,2275.73 3409.05,2231.11 3409.05,1871.11 3433.94,1846.22 3492.28,1846.22 ; 2407.13,2303.03 2407.13,2277.59 2449.1,2235.61 3017.2,2235.61 3072.23,2290.64 3379.52,2290.64 3423.95,2246.2 3423.95,1906.2 3434.33,1895.83 3491.89,1895.83 ; 2432.72,2078.62 2432.72,2002.44 v1(2439.33,1995.83) ; 2432.72,2303.03 2437.9,2297.85 2437.9,2272.4 2459.79,2250.52 3011.03,2250.52 3066.06,2305.54 3389.61,2305.54 3438.86,2256.3 3438.86,1976.3 3470.51,1944.65 3492.28,1944.65 ; 2446.54,2621.26 2471.97,2595.83 3224.33,2595.83 3370.64,2449.52 3488.02,2449.52 3609.33,2570.83 v1(3609.33,2605.83) ; 2446.54,2698.03 2421.09,2698.03 2387.13,2732 2387.13,2838.62 2424.33,2875.83 2599.33,2875.83 2654.33,2820.83 2889.33,2820.83 2989.33,2720.83 3227.87,2720.83 3279.33,2720.83 3404.33,2845.83 3404.33,3055.83 3423.94,3075.43 3492.28,3075.43 ; 2446.54,2723.62 2444.33,2725.83 2418.89,2725.83 2402.03,2742.68 2402.03,2823.53 2434.33,2855.83 2594.33,2855.83 2645.62,2804.54 2877.32,2804.54 2981.03,2700.83 3289.33,2700.83 3424.33,2835.83 3424.33,3010.83 3439.72,3026.22 3492.28,3026.22 ; 2446.54,2749.21 2710.95,2749.21 2804.02,2656.14 3383.49,2656.14 3408.59,2681.23 3434.85,2681.23 3449.74,2666.35 3449.74,2665.49 3459.79,2655.43 3492.28,2655.43 ; 2446.54,2774.8 2725.35,2774.8 2824.33,2675.83 3289.33,2675.83 3394.33,2780.83 3494.33,2780.83 3529.33,2745.83 3565.58,2745.83 3624.33,2687.08 3624.33,2665.83 3564.72,2606.22 3492.28,2606.22 ; 2448.08,2673.99 2446.54,2672.44 2500.95,2672.44 2504.33,2675.83 2739.33,2675.83 2773.93,2641.23 3409.74,2641.23 v1(3424.33,2655.83) ; v1(2450.95,1955.83) 2450.95,1967.44 2483.9,2000.39 2483.9,2078.62 ; 2483.9,2303.03 2521.51,2265.42 3004.85,2265.42 3059.88,2320.45 3409.78,2320.45 3629.33,2100.9 3629.33,2015.83 3607.36,1993.86 3492.28,1993.86 3471.66,1993.86 ; 2514.33,1969.88 2514.33,1980.83 ; 2531.3,2646.85 2534.33,2649.88 ; 2709.33,1775.83 2724.33,1790.83 2723.39,1791.77 ; v1(2719.33,1650.83) 2719.33,1680.83 2739.17,1700.67 2739.17,1738.62 ; 2739.17,1963.03 2739.17,1900.98 v1(2744.33,1895.83) ; 2740.51,1572.87 2740.51,1627.01 2763.93,1650.42 2844.23,1650.42 2867.13,1673.32 2867.13,1738.62 ; v1(2754.72,1676.22) 2789.33,1710.83 2789.33,1737.6 2790.35,1738.62 ; 2764.76,1770.39 2764.76,1738.62 2764.76,1786.26 ; 2789.72,1572.87 2789.72,1621.22 2794.33,1625.83 2840.72,1625.83 2892.72,1677.83 2892.72,1738.62 ; 2790.35,1963.03 2790.35,1879.8 2824.33,1845.83 2959.33,1845.83 v1(2999.33,1805.83) ; v1(2794.33,1675.83) 2815.95,1697.44 2815.95,1738.62 2808.93,1731.6 ; 2815.95,1963.03 2813.93,1961.01 2813.93,1886.23 2834.74,1865.42 2988.93,1865.42 v1@2994.33,1870.83 ; v1(2833.71,1675.83) 2834.33,1675.83 2841.54,1683.03 2841.54,1738.62 ; 2838.94,1572.87 2838.94,1602.97 2918.31,1682.34 2918.31,1738.62 ; v1(2839.33,1900.83) 2841.54,1903.03 2841.54,1963.03 ; 2867.13,1963.03 2867.13,1923.03 2879.33,1910.83 v1(2879.33,1890.83) ; 2888.15,1572.87 2888.15,1631.1 2943.9,1686.85 2943.9,1738.62 2943.9,1713.18 ; 2892.72,1963.03 2892.72,1927.44 2919.33,1900.83 2983.4,1900.83 2983.81,1901.23 3058.93,1901.23 v1(3094.33,1865.83) ; 2918.31,1963.03 2918.31,1937.59 2936.73,1919.16 3047.67,1919.16 3094.33,1965.83 v1(3094.33,1970.83) ; 2943.9,1963.03 2943.9,2000.39 2954.33,2010.83 v1(3094.33,2010.83) ; v1(3099.33,1815.83) 3099.33,1755.83 3194.33,1660.83 3289.33,1660.83 3369.33,1580.83 v1(3369.33,1510.83) ; 3157.56,2143.03 3157.56,2082.6 3194.33,2045.83 3309.33,2045.83 3334.33,2020.83 3334.33,1966.16 3311.1,1942.93 3311.1,1918.62 ; 3234.33,1918.62 3234.33,1981.76 3263.4,2010.83 v1(3294.33,2010.83) ; 3234.33,2143.03 3234.33,2115.83 3280.81,2069.35 3306.89,2069.35 3349.33,2026.91 3349.33,1700.83 3400.79,1649.37 3492.28,1649.37 ; 3259.92,1918.62 3259.33,1919.21 3259.33,1960.83 3269.33,1970.83 v1(3269.33,1980.83) ; 3259.92,2143.03 3259.92,2117.59 3293.25,2084.26 3313.06,2084.26 3364.33,2032.99 3364.33,1720.83 3386.58,1698.58 3492.28,1698.58 ; 3285.51,1918.62 3285.51,1947.01 3305.24,1966.73 v1(3305.24,1972.99) ; 3285.51,2143.03 3285.51,2117.59 3303.94,2099.16 3321,2099.16 3379.24,2040.92 3379.24,1775.92 3407.36,1747.8 3492.28,1747.8 ; 3311.1,1853.11 3314.33,1849.88 ; 3484.33,2149.45 3492.28,2141.5 ; 3491.1,2555.83 3492.28,2557.01 ; 3492.28,2704.65 3493.46,2705.83 ; 3492.28,2977.01 3494.33,2974.96
  Bottom Layer w10: v1(1454.33,2070.83) 1447.8,2070.83 1440.04,2078.58 1440.04,2095.32 1445.39,2100.67 1516.73,2100.67 ; 1474.33,2429.83 1474.33,2411.83 1492.42,2393.74 1585.54,2393.74 1605.17,2393.74 1619.06,2379.86 1619.06,2360.22 1607.28,2348.45 1607.28,2309.33 ; 1514.33,2489.88 1515.09,2490.64 ; 1554.21,1911.26 1554.21,1927.99 1568.98,1942.76 1612.28,1942.76 1626.97,1957.44 1626.97,1990.43 ; 1554.33,2429.83 1596.33,2429.83 1634.96,2391.2 1634.96,2353.63 1626.97,2345.64 ; v1(1616.22,2053.98) 1595.55,2053.98 1583.74,2065.79 1583.74,2106.14 1609.33,2131.73 1683.15,2131.73 1725.02,2173.6 1725.02,2193.91 1769.57,2238.46 1835.63,2238.46 ; 1634.33,1910.83 1634.33,1936.83 1646.65,1949.15 1646.65,1990.43 ; 1634.33,2448.83 1634.33,2432.9 1650.87,2416.36 1650.87,2347.05 1646.65,2342.83 1646.65,2309.33 ; 1666.34,2309.33 1666.77,2309.76 1666.77,2364.21 1693.33,2390.77 1693.33,2410.83 1713.33,2430.83 ; 1714.33,2429.88 1714.33,2431.77 ; 2892.72,1963.03 2892.72,1932.44 2894.74,1930.42 ; 2954.33,3010.83 2979.33,3010.83 2989.49,3020.98 3023.15,3020.98 ; 2954.33,3110.83 2954.33,3070.83 2984.11,3041.04 3022.78,3041.04 ; 3023.15,3040.67 3026.02,3043.54 3052.05,3043.54 3124.33,3115.83 v1(3124.33,3130.83) v1@3124.33,3120.83 ; 3023.15,3060.35 3023.15,3069.65 3064.33,3110.83 3074.33,3110.83 3074.33,3117.46 3113.6,3156.73 3120.24,3156.73 v1@3124.33,3160.83 ; 3114.33,2950.83 3074.33,2990.83 3074.33,3032.95 3102.21,3060.83 3125.04,3060.83 3125.51,3060.35 3258.86,3060.35 3389.33,3190.83 3529.33,3190.83 3599.33,3120.83 v1(3599.33,3115.83) ; 3125.51,3040.67 3274.17,3040.67 3311.83,3078.33 ; 3254.33,2870.83 3254.33,2895.83 3234.33,2915.83 3234.33,2960.83 3254.33,2980.83 3294.33,2980.83 3311.83,2998.33 3311.83,3078.33 ; v1(3569.33,3065.83) 3569.33,3120.83 3519.33,3170.83 3404.33,3170.83 3311.83,3078.33 ; v1@4011.35,2761.35 4000,2750 4000,2710 4060,2650 4200,2650 ; v1(4015,2815) 4007,2815 3982,2790 3982,2698.16 4110,2570.16 4110,2570 4130,2550 4200,2550 ; 4102.6,3075.98 4024.98,3075.98 3964,3015 3964,2676 v1(4005,2635) 4190,2450 4200,2450 ; v1(4140,3200) 4140,3165 4154.02,3150.98 4177.6,3150.98 4177.6,3076.18 4177.4,3075.98 ; v1(4150,3000) 4210,3000 4252.4,3042.4 4252.4,3150.98 ; v1(4310,3220) 4310.4,3220 4352.38,3261.98 4375.57,3261.98 4600,3037.55 4600,2950 ; v1(4342.8,3157.2) 4362.8,3137.2 4362.8,2987.2 4400,2950 ; v1(4363.98,3233.98) 4500,3097.95 4500,2950 ; v1(4985,3155) 5045.98,3215.98 5114.02,3215.98 ; 5188.82,3215.98 v1@5229.02,3215.98 ; v1@5226.44,3124.02 5267.6,3124.02 ; v1(5230,3215) 5230,3191.99 5174.22,3136.21 5174.22,2961.74 5172.47,2960 ; v1@5230,3215.98 5267.6,3215.98 ; 5336.73,1526.77 5338.51,1525 5420,1525 5506.97,1611.97 5506.97,1793.33 ; 5342.4,3124.02 5391.42,3075 v1(5420,3075) ; 5342.4,3215.98 5376.42,3215.98 5420.43,3260 v1(5475,3260) ; v1(5355,2115) 5359.06,2119.06 5400,2119.06 5400.94,2120 5480,2120 ; 5400,2060 5365,2060 5336.73,2031.73 5336.73,1900.79 5336.73,1891.26 5409.67,1818.33 5506.97,1818.33 ; v1(5415,2000) 5446.67,1968.33 5506.97,1968.33 5506.97,1993.03 5480,2020 5480,2060.94 ; v1(5420,3120) 5466.61,3120 5467.6,3120.98 5467.6,3025.98 ; v1(5425,3170) 5450,3195 5581.37,3195 5695,3081.37 v1(5695,2825) ; v1(5425,3220) 5585,3220 5725,3080 v1(5725,2775) ; 5506.97,1843.33 5583.67,1843.33 5597,1830 5597,1655 5575,1633 v1(5575,1505) ; 5506.97,1893.33 5591.67,1893.33 5615,1870 5615,1615 v1(5610,1610) ; 5508.87,1945.23 5506.97,1943.33 5582.87,1943.33 5598.33,1958.79 5598.33,2048.79 5519,2128.12 5519,2128.91 5509,2138.91 5509,2374.46 5584.15,2449.61 5627.95,2449.61 ; 5511.09,1922.45 5506.97,1918.33 5583.33,1918.33 5616.33,1951.33 5616.33,2056.24 5537,2135.58 5537,2136.37 5527,2146.37 5527,2367 5560.39,2400.39 5627.95,2400.39 ; 5542.4,3025.98 5542.4,2982.4 5520,2960 5172.47,2960 ; 5542.4,3120.98 5570.59,3120.98 5590,3101.57 v1(5590,3070) ; v1(5545,1660) 5565,1680 5565,1715 ; v1(5550,2735) 5400.06,2735 5331.56,2803.5 5153.5,2803.5 5100,2750 5100,2887.53 5172.47,2960 ; v1(5560,2155) 5560,2138.03 5595.2,2102.83 ; v1(5560,2225) 5600,2185 5745,2185 5759.06,2170.94 5759.06,2145 ; v1(5560,2350) 5561.18,2351.18 5627.95,2351.18 ; v1(5560,2500) 5561.18,2498.82 5627.95,2498.82 ; v1(5655,1685) 5640,1700 5640,1735 ; 5685,1735 5640,1735 ; 5700,2145 5637.37,2145 5595.2,2102.83 ; 5711.69,1793.33 5653.33,1793.33 5640,1780 5640,1735 ; 5711.69,1818.33 5761.67,1818.33 5780,1800 5780,1735 ; 5711.69,1843.33 5651.83,1843.33 5634.33,1860.83 5634.33,2063.7 5595.2,2102.83 ; 5711.69,1893.33 5771.83,1893.33 v1(5789.33,1875.83) ; 5711.69,1918.33 5786.83,1918.33 v1(5789.33,1920.83) ; 5711.69,1968.33 5734.33,1990.96 v1(5734.33,2010.83) ; v1(5714.33,2045.83) 5754.33,2045.83 5768,2032.16 5768,1955.07 5756.26,1943.33 5711.69,1943.33 5753.43,1943.33 ; v1(5730,1635) 5780,1685 5780,1735 ; 5744.06,1735 5780,1735 ; 3125.51,3001.3 3125.51,3020.98 3184.17,3020.98 3194.33,3010.83 3184.8,3001.3 3125.51,3001.3
  Bottom Layer w15: 1554.33,1851.77 1634.33,1851.77 ; v2(1634.33,1805.83) 1644.37,1795.79 1644.37,1795.11 1644.1,1795.11 1634.33,1804.88 1634.33,1851.77 ; 1705.71,1990.43 1705.71,1899.45 1723.62,1881.54 v2(1805.09,1881.54) ; 1714.33,2490.83 1739.38,2490.83 v2(1775.09,2526.54) ; 1754.33,1851.77 1634.33,1851.77 ; 1874.33,3309.88 1843.39,3309.88 1824.33,3290.83 1824.33,3240.83 1914.33,3150.83 1914.33,3050.83 1954.33,3010.83 1954.33,2930.83 1974.33,2910.83 v1(2014.33,2910.83) ; 1914.33,1990.83 1994.33,1990.83 2020.09,2016.58 v2(2020.09,2051.54) ; v1(2059.33,2655.83) 2134.33,2655.83 ; v2(2097.09,2491.54) 2134.33,2528.78 2134.33,2550.83 ; v2(2132.8,2875.83) 2179.33,2875.83 2194.33,2890.83 2274.33,2890.83 2354.33,2890.83 ; 2134.33,2609.88 2134.33,2655.83 ; 2222.13,2646.85 2158.31,2646.85 2149.33,2655.83 2134.33,2655.83 ; 2304.76,2078.62 2304.76,2121.26 2319.33,2135.83 2439.33,2135.83 2458.31,2116.85 2458.31,2114.8 ; 2354.33,2895.83 2354.33,2890.83 ; 2446.54,2800.39 2503.95,2800.39 2514.38,2810.83 v2(2534.33,2810.83) ; 2458.31,2078.62 2458.31,2114.8 ; 2531.3,2646.85 2446.54,2646.85 2393.31,2646.85 2354.33,2685.83 2354.33,2890.83 ; 2534.33,2370.83 2534.33,2415.78 v2(2540.09,2421.54) ; 2534.33,2651.77 2728.39,2651.77 2759.33,2620.83 3284.55,2620.83 3433.42,2471.95 3485.13,2471.95 3554.33,2541.15 v1(3554.33,2560.83) ; v2@2593.39,2109.88 2534.33,2109.88 2534.33,2130.83 2519.33,2145.83 2489.33,2145.83 2458.31,2114.8 ; v2(2609.33,1850.83) 2674.33,1850.83 ; 2674.33,1589.84 2674.33,1690.83 ; v1(2709.33,1720.83) 2709.33,1775.83 ; 2764.76,1786.26 2769.33,1790.83 2974.16,1790.83 3004.16,1760.83 3009.33,1755.66 3009.33,1620.83 2961.38,1572.87 2937.36,1572.87 ; 2764.76,1963.03 2764.76,2020.32 2775.28,2030.83 v2@2775.28,2090.83 ; 2834.33,2030.83 2839.33,2035.83 v2(2894.33,2035.83) ; v1(2849.33,2965.83) 2849.33,2935.83 ; 2850.28,2934.88 2849.33,2935.83 ; 2869.42,2945.74 2859.5,2935.83 ; 2895.28,3010.83 2894.33,3009.88 v1(2894.33,2970.83) 2899.33,2975.83 2997.68,2975.83 3023.15,3001.3 ; v2@2964.33,1660.83 2969.49,1665.98 2969.49,1738.62 ; 2969.49,1963.03 v1@3002.13,1963.03 ; 3157.56,1918.62 3157.56,1842.6 3214.33,1785.83 v2(3214.33,1730.83) ; 3194.33,3010.83 3274.33,3010.83 ; 3195.28,2870.83 3195.28,2950.83 3173.39,2950.83 3113.39,2890.83 3104.33,2890.83 3059.33,2935.83 3029.33,2935.83 2934.33,2935.83 2859.5,2935.83 ; 3255.28,2230.83 3259.33,2230.83 3311.1,2179.06 3311.1,2143.03 ; 3274.33,2951.77 3275.28,2950.83 v2(3339.33,2950.83) ; v1(3424.33,3135.83) 3435.51,3124.65 3492.28,3124.65 3496.1,3120.83 ; 3491.1,1945.83 3492.28,1944.65 ; 3491.89,1895.83 3492.28,1895.43 ; 3493.46,2705.83 v1(3569.33,2705.83) ; v1(7269.72,1491.22) v1@7638.94,1491.22 ; 2849.33,2935.83 2859.5,2935.83
  Bottom Layer w20: v2(1444.33,1650.83) 1484.33,1690.83 1494.33,1690.83 ; v2(1464.33,3050.83) 1547.72,3050.83 1596.93,3001.61 ; 1474.33,2489.88 1514.33,2489.88 1554.33,2489.88 1574.33,2509.88 1634.33,2509.88 1714.33,2429.88 ; 1515.09,2490.64 v2(1515.09,2536.54) ; 1553.39,1690.83 1656.93,1690.83 ; v2(1629.33,3290.83) 1629.33,3234.88 1634.33,3229.88 ; 1634.33,3100.04 1634.33,3170.83 ; 1671.73,3001.61 1762.6,3001.61 1774.33,2989.88 ; 1714.33,2431.77 1919.85,2431.77 v2(1925.09,2426.54) ; v2(1809.33,3110.83) 1809.33,3060.83 1888.54,2981.61 1916.93,2981.61 ; 1874.33,3250.83 1874.33,3225.83 1894.33,3205.83 1969.33,3205.83 2004.33,3170.83 2004.33,3125.83 2034.33,3095.83 2069.33,3095.83 2099.33,3125.83 2099.33,3140.83 2144.33,3185.83 2207.22,3185.83 2252.22,3230.83 2331.48,3230.83 2376.48,3185.83 2377.39,3186.73 2480.24,3186.73 2499.33,3205.83 2614.33,3205.83 v2(2644.33,3175.83) 2759.33,3060.83 v1(2859.33,3060.83) 2884.33,3060.83 ; 1874.33,3309.88 1928.35,3309.88 1947.4,3290.83 ; 1954.33,3080.04 v2(1954.33,3145.83) ; 1991.73,2981.61 2045.12,2981.61 2075.28,3011.77 2075.28,3050.83 ; 2014.33,3225.87 2024.29,3225.87 2054.33,3195.83 ; v2(2054.33,3150.83) 2054.33,3145.83 2054.33,3195.83 ; 2081.26,3290.83 2081.26,3222.76 2054.33,3195.83 ; v2(2094.33,2215.83) 2094.33,2291.77 ; 2094.33,2350.83 2174.33,2350.83 2254.33,2350.83 2279.33,2350.83 2288.86,2360.35 v2@2421.27,2360.35 ; v2(2127.8,2805.83) 2084.33,2849.29 2084.33,2895.83 2138.39,2949.88 2194.33,2949.88 2223.39,2920.83 2594.33,2920.83 2638.39,2876.77 2849.33,2876.77 2880.28,2845.83 2914.33,2845.83 2999.33,2760.83 v2(3064.33,2760.83) ; 2174.33,1690.12 2174.33,1851.54 ; v2(2174.33,2185.83) 2174.33,2291.77 ; 2199.33,2954.88 v2(2199.33,3015.83) 2219.33,3035.83 v2(2219.33,3140.83) ; 2240.51,1572.87 2240.51,1647.01 2249.33,1655.83 v2(2249.33,1717.87) 2249.33,1795.83 2274.33,1820.83 2399.33,1820.83 2436.93,1783.23 2436.93,1690.83 ; v2(2254.33,2220.83) 2254.33,2291.77 ; 2269.33,2954.88 v2(2269.33,3020.83) ; 2318.94,3148.78 2321.89,3145.83 v2(2394.33,3145.83) ; 2354.33,2949.88 2388.39,2949.88 2454.33,3015.83 2717.31,3015.83 2807.31,2925.83 2825.03,2908.11 2873.64,2908.11 2877.95,2912.42 2898.68,2912.42 2934.33,2876.77 3000.28,2810.83 3084.33,2810.83 v2(3134.33,2760.83) ; v2(2405.09,2376.54) v2@2421.27,2360.35 ; 2458.31,2303.03 2458.31,2353.86 2464.8,2360.35 ; 2475.28,2370.83 2464.8,2360.35 ; 2511.73,1690.83 2615.28,1690.83 ; 2514.33,1910.83 2594.33,1910.83 2674.33,1910.83 2724.33,1860.83 2724.33,1790.83 2764.33,1790.83 ; 2514.33,1980.83 2544.33,2010.83 2574.33,2010.83 v2(2594.33,2030.83) ; 2534.33,2050.83 2556.48,2050.83 2580.06,2074.4 2627.91,2074.4 2659.33,2105.83 v2(2659.33,2130.83) ; v2(2574.33,1605.83) 2658.35,1605.83 2674.33,1589.84 2691.3,1572.87 ; 2594.33,1969.88 2649.33,2024.88 2649.33,2055.83 2724.33,2130.83 v2(2729.33,2130.83) ; 2674.33,1791.77 2723.39,1791.77 ; 2674.33,1969.88 2674.33,2010.83 v2(2699.33,2035.83) ; 2954.33,3010.83 2904.33,3060.83 2884.33,3060.83 ; 3015.28,3110.83 3015.28,3134.88 2999.33,3150.83 2970,3150.83 2929.33,3150.83 2895.28,3116.77 2895.28,3110.83 2895.28,3071.77 2884.33,3060.83 ; 3029.33,2876.77 3060.28,2845.83 3157.8,2845.83 v2(3197.8,2805.83) ; v2@3214.41,1730.83 3274.41,1790.83 3314.33,1790.83 ; v1@3289.33,1830.83 3295.28,1830.83 3314.33,1849.88 ; 3311.1,1853.11 3311.1,1918.62 ; 3311.1,2143.03 v1(3346.54,2143.03) ; v2(3449.33,2510.35) 3449.33,2514.06 3492.28,2557.01 ; 3484.33,2149.45 v2(3484.33,2195.83) ; 3492.28,2092.28 3492.28,2141.5 ; v2(3494.33,2925.83) 3494.33,2974.96 ; v2@3567.09,2043.07 v2(3569.33,2040.83) ; v1(4595,3275) 4630,3275 4652.6,3252.4 4780.98,3252.4 ; v2@2421.27,2360.35 2464.8,2360.35
  Bottom Layer w25: 4700,3185 4707.4,3177.6 4780.98,3177.6 ; 4780,3170 4780,3120 4820.24,3079.76 5017.01,3079.76 5066.77,3030 5066.77,2916.77 5000,2850 ; v2@7059.33,2473.86 7114.33,2473.86
  Bottom Layer w30: 1731.73,1690.83 1734.33,1693.43 1734.33,1755.83 v2(1784.33,1755.83) ; 1780.51,1572.87 1784.33,1576.69 v2(1784.33,1755.83) ; v2@1784.33,1770.83 v2(1784.33,1755.83) ; v2(1904.06,1721.1) 1904.06,1651.1 1928.15,1627.01 1928.15,1572.87 ; 2269.72,3148.78 2269.72,3110.43 2354.33,3025.83 2354.33,2954.63 ; 2534.33,2710.83 2604.38,2710.83 v2(2605.09,2711.54) ; v2(3214.33,1730.83) v2@3214.41,1730.83 ; 3314.33,2230.83 3324.33,2230.83 v2(3354.33,2200.83) ; 3492.28,2043.07 v2@3567.09,2043.07
  Bottom Layer w40: v2@1784.33,1770.83 1824.33,1810.83 1886.32,1810.83 1943.72,1753.43 v2@2084.33,1753.43
  Bottom Layer w50: 6899.33,2685.83 6904.33,2680.83 v2(6904.33,2195.83) v2(6904.33,2125.83) ; 7211.46,1777.95 7214.33,1780.83 ; 7214.33,2099.84 7214.33,2114.33 ; 7219.33,3060.83 7234.33,3075.83 ; 7758.15,2434.65 7764.33,2440.83
  Bottom Layer w100: 6202.04,2258.99 6202.04,2263.54 6216.46,2277.95 6377.95,2277.95 ; 6664.33,2935.83 6876.77,2935.83 6877.95,2934.65 6877.95,2959.45 6979.33,3060.83 7219.33,3060.83 ; 7034.65,1777.95 7211.46,1777.95 ; 7234.33,3075.83 7234.33,3245.83 ; 7534.65,2434.65 7758.15,2434.65
  Bottom Layer w200: 6094.33,2685.83 6899.33,2685.83 7084.33,2685.83 ; 6202.04,2258.99 6134.33,2191.28 6134.33,1895.83 6474.33,1555.83 7099.33,1555.83 7214.33,1670.83 7214.33,1780.83 7214.33,2099.84 7643.35,2099.84 7764.33,2220.83 7764.33,2440.83 7764.33,2680.83 7394.33,3050.83 7229.33,3050.83
  other v1: 3289.24,1830.83 3004.33,1960.83
  other v2: 2029.33,1755.83 2084.33,1755.83 2096.41,2745.82 1749.33,3095.83 3099.33,3225.83

## Polygon pours and split planes (outlines as drawn)
no net on Top Layer "Top_AGND" (solid, pour order 1000): 5550,3300 5625,3225 5625,3050 5525,2950 5100,2950 5025,3025 4875,3025 4850,3050 4850,3275 4875,3300
no net on Top Layer "under_gumstix" (solid, remove dead copper, pour order 1010): 1389.33,2415.83 3674.33,2415.83 3679.33,2410.83 3679.33,1725.83 1394.33,1725.83 1389.33,1730.83 1389.33,2415.83
no net on Top Layer "Top Layer-No Net" (solid, remove dead copper, pour order 1014): 1876.02,2730.08 1967.67,2730.08 2003.03,2694.72 2002.05,2693.74 2002.05,2557.91 1913.46,2557.91 1879.85,2591.53 1879.85,2726.25
no net on Top Layer "Top Layer-No Net" (solid, remove dead copper, pour order 1013): 1801.26,2938.82 1969.57,2938.82 1970.55,2937.83 2036.5,2871.89 2041.42,2871.89 2041.42,2792.17 2045.35,2788.23 2017.8,2760.67 1875.08,2760.67 1865.24,2760.67 1803.23,2822.68 1801.26,2824.65 1801.26,2938.82
no net on Top Layer "Top Layer-No Net" (solid, remove dead copper, pour order 1012): 2883.62,2784.09 2907.76,2784.09 2907.76,2781.14 2957.76,2731.14 2958.74,2730.16 3012.87,2730.16 3012.87,2690.79 3015.83,2687.83 3019.76,2683.9 3047.32,2683.9 3084.72,2683.9 3086.69,2681.93 3099.49,2669.13 3099.49,2591.38 3100.47,2590.39 3090.63,2580.55 2982.36,2580.55 2950.87,2612.05 2950.87,2616.97 2950.87,2729.17 2949.88,2730.16 2895.95,2784.09 2883.62,2784.09
no net on Top Layer "C5_1" (solid, remove dead copper, pour order 1009): 2893.78,2946.69 2894.8,2945.7 2894.8,2801.95 2915.32,2801.95 2940.39,2777.52 3010.74,2777.52 3068.98,2834.27 3068.98,2909.63 3030.94,2946.69 2893.78,2946.69
no net on Top Layer "VCC_5V" (solid, remove dead copper, pour order 1007): 2494.33,2810.83 2489.33,2815.83 2489.33,2835.83 2484.33,2835.83 2469.33,2850.83 2324.33,2850.83 2294.33,2880.83 2289.33,2885.83 2289.33,2970.83 2279.33,2970.83 2264.33,2985.83 2259.33,2980.83 2004.33,2980.83 2004.33,2450.83 1934.33,2380.83 1924.33,2370.83 1924.33,1695.83 2224.33,1695.83 2229.33,1700.83 2229.33,2065.83 2229.33,2633.66 2294.33,2698.66 2301.5,2705.83 2459.33,2705.83 2474.33,2705.83 2494.33,2725.83 2494.33,2810.83
no net on Top Layer "VCC_3V3" (solid, remove dead copper, pour order 1015): 3109.33,3110.83 3344.33,3110.83 3354.33,3100.83 3444.33,3010.83 3444.33,2385.83 3444.33,1735.83 3324.33,1615.83 3299.33,1590.83 3024.33,1590.83 3024.33,1720.83 2924.33,1820.83 2919.33,1825.83 2919.33,3035.83 2919.33,3045.83 2979.33,3105.83 2984.33,3110.83 3109.33,3110.83
no net on Top Layer "VCC_1V8" (solid, remove dead copper, pour order 1008): 3114.33,2455.83 3159.11,2455.83 3235.88,2395.83 3517.35,2395.83 3549.33,2420.83 3549.33,2750.83 3549.33,2755.83 3510.95,2785.83 3114.33,2475.83 3114.33,2455.83
no net on Top Layer "GND" (solid, remove dead copper, pour order 1011): 1499.33,3345 1379.33,3223.8 1379.33,2415.83 3689.33,2415.83 3689.33,3223.8 3569.33,3345 1499.33,3345
no net on Mid-Layer 1 "+5V" (solid, pour order 1002): 4230,2080 4070,2080 4070,1820 4230,1820 4230,2080